# Altium PCB ETH_M_V1.PcbDoc
Units mm, origin at the board's own origin, x right, y up, seen from the top; angles counter-clockwise.
Board outline 30.8 x 19 mm, 2 copper layers (Top Layer, Bottom Layer); 28 components, 36 nets, 137 pads, 44 vias.
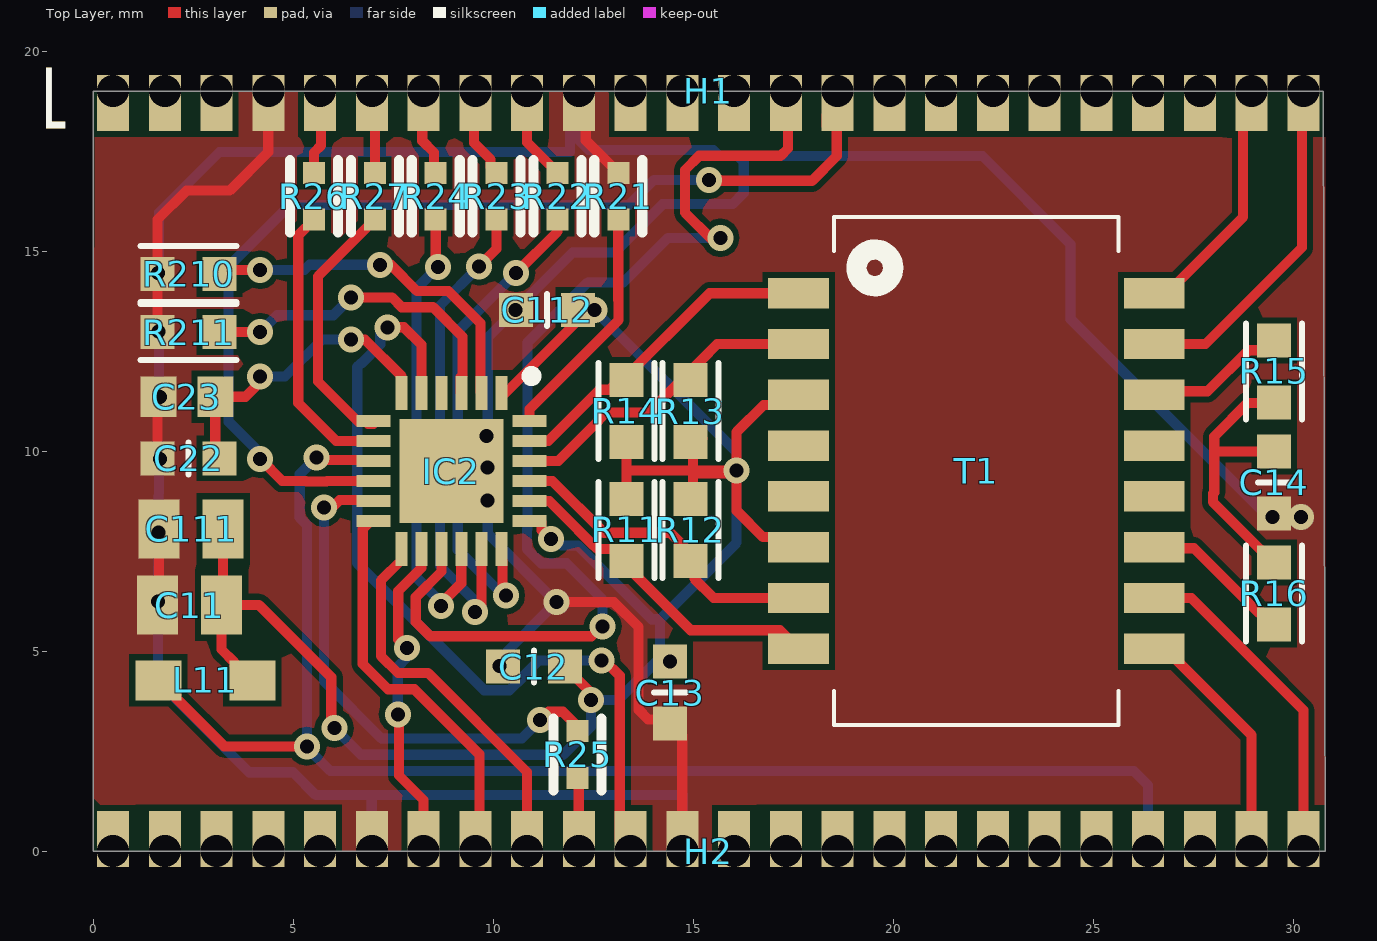
[diagram p0: Top Layer view]
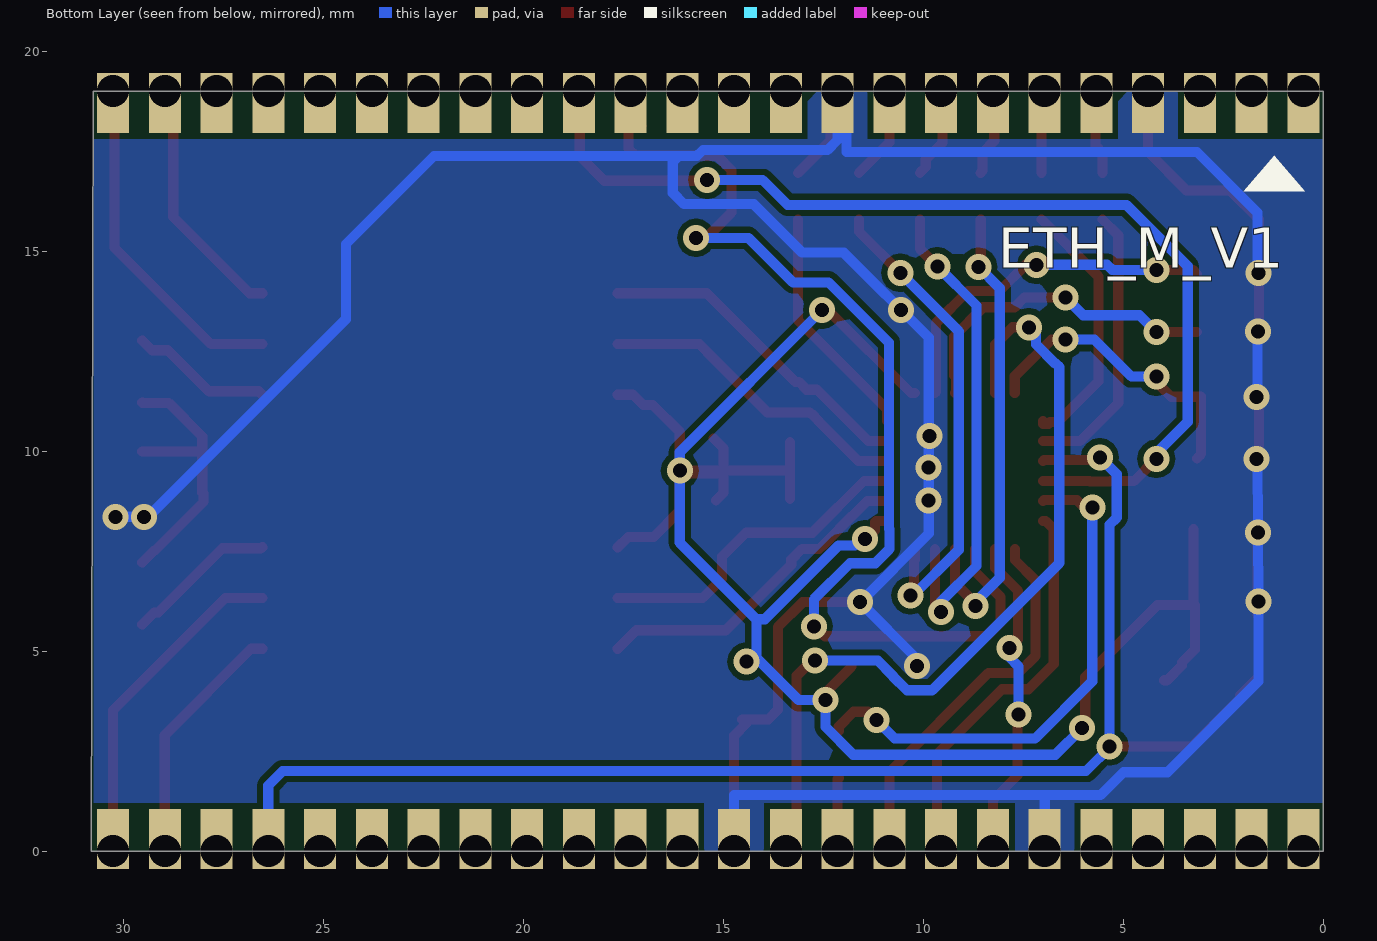
[diagram p1: Bottom Layer view, seen from below]
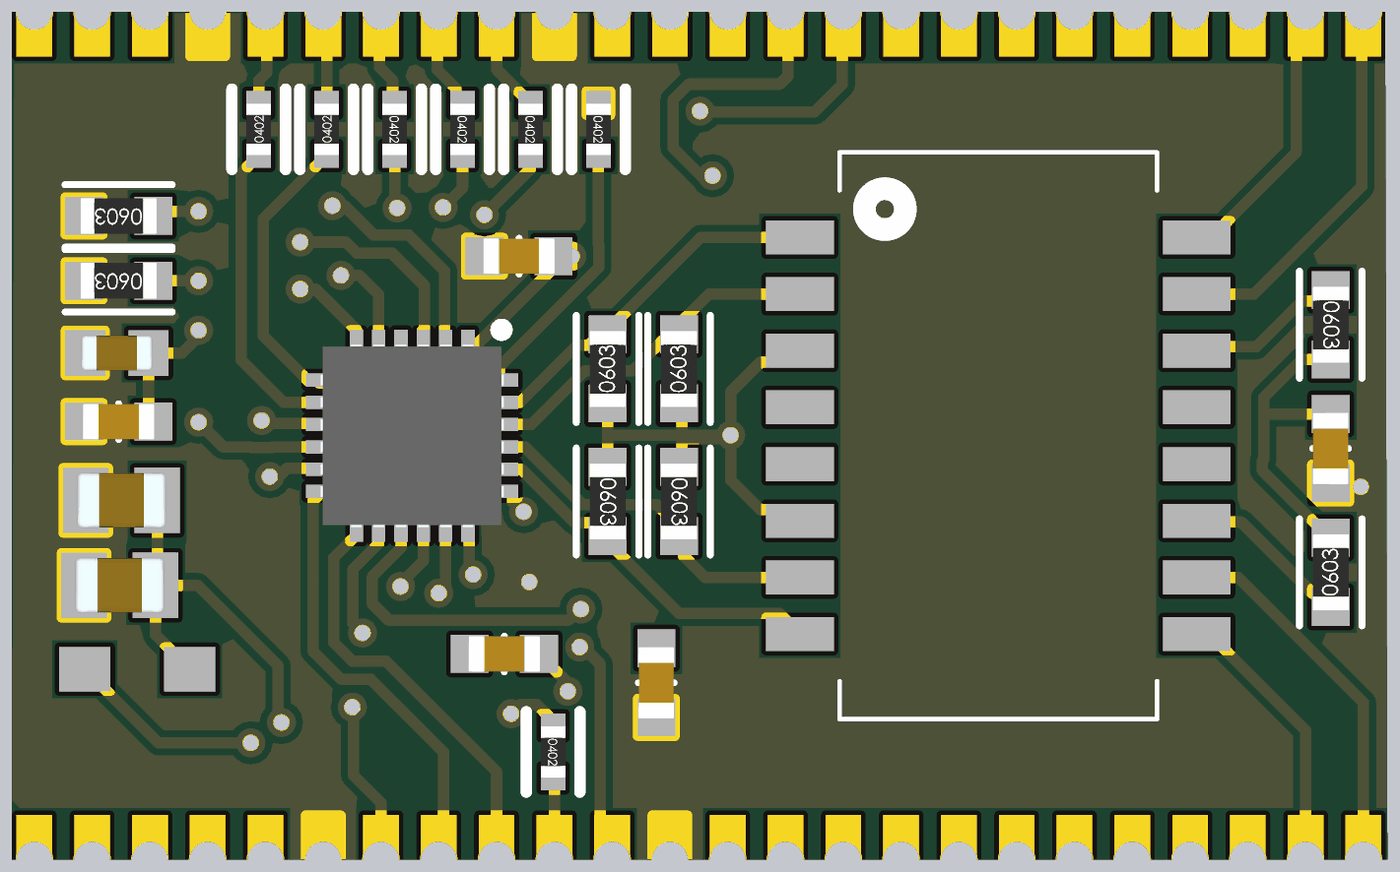
[diagram p2: 3D render of the assembled board from above, using the file's embedded part models]

## Layer stack, top to bottom
Top Solder: solder mask 0.0102, Solder Resist, Dk 3.5
Top Layer: signal copper 0.0356
Dielectric 1: dielectric 0.32, FR-4, Dk 4.8
Bottom Layer: signal copper 0.0356
Bottom Solder: solder mask 0.0102, Solder Resist, Dk 3.5

## Board outline
0,0 0,19 30.75,19 30.8,0

## Design rules (kind name [scope] priority, off if disabled: settings)
AssemblyTestPointUsage SilkToBoardRegionClearance_1 [All] p2:
AssemblyTestPointUsage SilkToBoardRegionClearance [All] p3:
Clearance [All] p1: gap=0.152 ignorepadtopadclearanceinfootprint=FALSE except(0: Arc-Hole Track-Hole SMDPad-Hole THPad-Hole Via-Hole Fill-Hole Poly-Hole Region-Hole Text-Hole)
HoleSize [All] p1: absolutevalues=TRUE maxlimit=6.35 minlimit=0.3 maxpercent=80.000 minpercent=20.000
MatchedLengths DiffPair_DIFF100MatchedLengths [InDifferentialPairClass('DIFF100')] p1: tolerance=0.152 checknetsindiffpair=TRUE checkdiffpairvsdiffpair=FALSE checkxsignals=FALSE checkothers=FALSE usedelayunits=FALSE
MinimumSolderMaskSliver [All] p1: minsoldermaskwidth=0.1
MinimumSolderMaskSliver SilkscreenOverComponentPads_2 [All] p2: minsoldermaskwidth=0.254
MinimumSolderMaskSliver SilkToSolderMaskClearance_1 [IsPad] p3: minsoldermaskwidth=0.254
MinimumSolderMaskSliver SilkscreenOverComponentPads_1 [All] p4: minsoldermaskwidth=0.254
MinimumSolderMaskSliver SilkToSolderMaskClearance [IsPad] p5: minsoldermaskwidth=0.254
MinimumSolderMaskSliver SilkscreenOverComponentPads [All] p6: minsoldermaskwidth=0.254
PolygonConnect [All] p1: connectstyle=Direct reliefconductorwidth=0.254 reliefentries=4 polygonreliefangle="90 Angle" airgapwidth=0.254
RoomDefinition ETH_M_V1 [InComponentClass('ETH_M_V1')] p1: confinementstyle=ConfineIn formatcopy=TRUE lockcomponents=FALSE outline -0.102,-0.559 30.81,-0.559 30.81,19.71 -0.102,19.71
RoutingVias [All] p1: holewidth=0.305 width=0.635 viastyle="Through Hole" minholewidth=0.305 minwidth=0.635 maxholewidth=0.711 maxwidth=1.27
SilkToBoardRegionClearance SilkToBoardRegionClearance_2 [All] p1:
SilkToSolderMaskClearance SilkToSolderMaskClearance_2 [IsPad] p1: minsilkscreentomaskgap=0.254 clearancetoexposedcopper=TRUE
SolderMaskExpansion [All] p1: expansion=0.102
Width [All] p1: maxlimit=2.54 minlimit=0.152 preferedwidth=0.254
26 further rules are at their usual default settings.

## Components (designator, comment, footprint, x,y, rotation, side; value= is the part's Value field where it differs from the comment)
C11 "C0805C475K3RACAUTO" CAPC2012X125N 2.413,6.147 r0 top
C12 "0.10µF" SMD-0603C 11.024,4.61 r270 top
C13 "0.10µF" SMD-0603C 14.427,3.962 r0 top
C14 "0.10µF" SMD-0603C 29.527,9.214 r0 top
C22 "470pF" SMD-0603C 2.388,9.817 r270 top
C23 "GCJ188R71E105KA01D" CAPC1608X100N 2.348,11.356 r0 top
C111 "C0805C475K3RACAUTO" CAPC2012X125N 2.451,8.052 r0 top
C112 "0.10µF" SMD-0603C 11.354,13.525 r270 top
H1 "CASTELLATED 24 pin" "CASTELLATED 24 pin" 30.26,19 r180 top locked
H2 "CASTELLATED 24 pin" "CASTELLATED 24 pin" 0.5,0 r0 top locked
IC2 "LAN8720A-CP-TR" QFN50P400X400X100-25N-D 8.961,9.5 r270 top
L11 "BLM21PG331SN1D" INDC2012X87 2.807,4.267 r180 top
R11 "49.9" SMD-0603-RES 13.335,8.026 r180 top
R12 "49.9" SMD-0603-RES 14.935,8.026 r180 top
R13 "49.9" SMD-0603-RES 14.935,10.998 r0 top
R14 "49.9" SMD-0603-RES 13.335,10.998 r0 top
R15 "75" SMD-0603-RES 29.527,11.989 r180 top
R16 "75" SMD-0603-RES 29.527,6.439 r0 top
R21 "12.1" SMD-0402-RES 13.132,16.37 r180 top
R22 "33" SMD-0402-RES 11.61,16.37 r180 top
R23 "33" SMD-0402-RES 10.089,16.37 r180 top
R24 "33" SMD-0402-RES 8.567,16.37 r180 top
R25 "33" SMD-0402-RES 12.116,2.413 r180 top
R26 "33" SMD-0402-RES 5.524,16.37 r0 top
R27 "33" SMD-0402-RES 7.046,16.37 r0 top
R210 "10k" SMD-0603-RES 2.388,14.427 r90 top
R211 "10k" SMD-0603-RES 2.388,12.974 r90 top
T1 "H0013NL" H0013NL 22.085,9.5 r270 top

## Footprints (in the part's own frame and the unit in brackets; to place one, negate y for a bottom-side part, rotate by r counter-clockwise, add the part's x,y. Pads: shape width x height; smd on the part's side, far side on the other; paste and mask are expansions set on the pad)
CAPC1608X100N [mm]
  rect 0.9x1.02 smd: 1(-0.71,0) 2(0.71,0)
  body extent -0.8,-0.4 0.8,0.4, height 1
CAPC2012X125N [mm]
  rect 1.02x1.47 smd: 1(-0.8,0) 2(0.8,0)
  body extent -1,-0.63 1,0.63, height 1.25
"CASTELLATED 24 pin" [mm]
  rect 0.8x1.4 / inner rect 0.8x1.5 / far side rect 0.8x1.5 hole 0.8 copper offset 0,0.3: 1(0,0) 2(1.294,0) 3(2.587,0) 4(3.881,0) 5(5.175,0) 6(6.469,0) 7(7.762,0) 8(9.056,0) 9(10.35,0) 10(11.644,0) 11(12.938,0) 12(14.232,0) 13(15.526,0) 14(16.82,0) 15(18.114,0) 16(19.408,0) 17(20.702,0) 18(21.996,0) 19(23.29,0) 20(24.584,0) 21(25.878,0) 22(27.172,0) 23(28.466,0) 24(29.76,0)
H0013NL [mm]
  rect 0.76x1.52 smd: 1(-4.445,-4.445) 2(-3.175,-4.445) 3(-1.905,-4.445) 4(-0.635,-4.445) 5(0.635,-4.445) 6(1.905,-4.445) 7(3.175,-4.445) 8(4.445,-4.445) 9(4.445,4.445) 10(3.175,4.445) 11(1.905,4.445) 12(0.635,4.445) 13(-0.635,4.445) 14(-1.905,4.445) 15(-3.175,4.445) 16(-4.445,4.445)
  silkscreen extent -6.35,-3.55 6.35,3.55
INDC2012X87 [mm]
  rect 1.15x1 smd: 1(-1.175,0) 2(1.175,0)
QFN50P400X400X100-25N-D [mm]
  rect 0.85x0.3 smd: 1(-1.95,1.25) 2(-1.95,0.75) 3(-1.95,0.25) 4(-1.95,-0.25) 5(-1.95,-0.75) 6(-1.95,-1.25) 13(1.95,-1.25) 14(1.95,-0.75) 15(1.95,-0.25) 16(1.95,0.25) 17(1.95,0.75) 18(1.95,1.25)
  rect 0.3x0.85 smd: 7(-1.25,-1.95) 8(-0.75,-1.95) 9(-0.25,-1.95) 10(0.25,-1.95) 11(0.75,-1.95) 12(1.25,-1.95) 19(1.25,1.95) 20(0.75,1.95) 21(0.25,1.95) 22(-0.25,1.95) 23(-0.75,1.95) 24(-1.25,1.95)
  rect 2.6x2.6 smd: 25(0,0)
  silkscreen extent -2.5,1.88 -2.25,2.13, body extent -2.05,-2.05 2.05,2.05, height 1
SMD-0402-RES [mm]
  rect 0.55x0.55 smd: 1(0,0.584) 2(0,-0.584)
  silkscreen extent -0.6,-0.9 0.6,0.9, body extent -0.28,-0.57 0.27,0.58, height 0.41
SMD-0603-RES [mm]
  rect 0.85x0.85 smd: 1(0,0.775) 2(0,-0.775)
  silkscreen extent -0.7,-1.2 0.7,1.2, body extent -0.4,-0.85 0.4,0.85, height 0.56
SMD-0603C [mm]
  rect 0.85x0.85 smd: 1(0,0.775) 2(0,-0.775)
  silkscreen extent -0.4,0 0.4,0, body extent -0.4,-0.8 0.4,0.8, height 0.9

## Part data
C11 C111: "Capacitor", Manufacturer_Name=Kemet, Mouser2 Part Number=80-C0805C475K3RAUTO, Datasheet Link=https://componentsearchengine.com/Datasheets/1/C0805C475K3RACAUTO.pdf, Height=1.25mm, Manufacturer_Part_Number=C0805C475K3RACAUTO, Mouser2 Price/Stock=https://www.mouser.com/Search/Refine.aspx?Keyword=80-C0805C475K3RAUTO, Supplier 1=Mouser, Supplier Part Number 1=80-C0805C475K3RAUTO
C12 C13 C14 C112: library part GCJ188R71H104KA12D, "CAP CER 0.1UF 50V X7R 0603", Digi-Key Part Number=490-5798-1-ND, Manufacturer="Murata Electronics North America", Operating Temperature="-55°C ~ 125°C", Package / Case="0603 (1608 Metric)", Ratings=AEC-Q200, Supplier Part Number 1=81-GCJ188R71H104KA2D, Temperature Coefficient=X7R, Tolerance=±10%, Voltage=50V, @ qty=0, Applications="Automotive, Boardflex Sensitive", Datasheets=http://www.murata.com/~/media/webrenewal/support/library/catalog/products/capacitor/mlcc/c03e.ashx, Factory Stock=0, Features="Soft Termination", Height - Seated (Max)=-, Image=//media.digikey.com/Renders/Murata%20Renders/0603%28LQG18%29.jpg, Lead Spacing=-, Lead Style=-, Minimum Quantity=1, Mounting Type="Surface Mount, MLCC", Packaging="Cut Tape (CT)", Part Number=GCJ188R71H104KA12D, Part Status=Active, Quantity Available=163695, Series=GCJ, Size / Dimension="0.063\" L x 0.031\" W (1.60mm x 0.80mm)", Supplier 1=Mouser, Thickness (Max)="0.035\" (0.90mm)", Unit Price (USD)=0.12
C22: library part GRM1885C1H471JA01D, "CAP CER 470PF 50V NP0 0603", Digi-Key Part Number=490-1443-1-ND, Manufacturer="Murata Electronics North America", Operating Temperature="-55°C ~ 125°C", Package / Case="0603 (1608 Metric)", Ratings=-, Supplier Part Number 1=81-GRM39C471J50, Temperature Coefficient="C0G, NP0", Tolerance=±5%, Voltage=50V, @ qty=0, Applications="General Purpose", Datasheets=http://www.murata.com/~/media/webrenewal/support/library/catalog/products/capacitor/mlcc/c02e.pdf, Factory Stock=0, Features=-, Height - Seated (Max)=-, Image=//media.digikey.com/Renders/Murata%20Renders/ZRB-SERIES-0402.jpg, Lead Spacing=-, Lead Style=-, Minimum Quantity=1, Mounting Type="Surface Mount, MLCC", Packaging="Cut Tape (CT)", Part Number=GRM1885C1H471JA01D, Part Status=Active, Quantity Available=472909, Series=GRM, Size / Dimension="0.063\" L x 0.031\" W (1.60mm x 0.80mm)", Supplier 1=Mouser, Thickness (Max)="0.035\" (0.90mm)", Unit Price (USD)=0.11
C23: "Capacitor", Manufacturer_Name="Murata Electronics", Supplier Part Number 1=81-GCJ188R71E105KA1D, Datasheet Link=https://psearch.en.murata.com/capacitor/product/GCJ188R71E105KA01%23.html, Height=1mm, Manufacturer_Part_Number=GCJ188R71E105KA01D, Supplier 1=Mouser
IC2: "Integrated Circuit", Manufacturer_Name=Microchip, Mouser2 Part Number=886-LAN8720A-CP-TR, Datasheet Link=https://componentsearchengine.com/Datasheets/1/LAN8720A-CP-TR.pdf, Height=1mm, Manufacturer_Part_Number=LAN8720A-CP-TR, Mouser2 Price/Stock=https://www.mouser.com/Search/Refine.aspx?Keyword=886-LAN8720A-CP-TR, Supplier 1=Mouser, Supplier Part Number 1=886-LAN8720A-CP-TR
L11: "Ferrite Beads Multi-Layer 330Ohm 25% 100MHz 1.5A 70mOhm DCR 0805 Paper T/R", Package="0805 Murata", Supplier Part Number 1=81-BLM21P331SG, Digi-Key_Part_Number=490-5988-1-ND, Digi-Key_Purchase_URL=https://www.digikey.ru/product-detail/en/murata-electronics-north-america/BLM21PG331SN1D/490-5988-1-ND/3845188?utm_source=snapeda&utm_medium=aggregator&utm_campaign=symbol, MF=Murata, MP=BLM21PG331SN1D, SnapEDA_Link=https://www.snapeda.com/parts/BLM21PG331SN1D/Murata%20Electronics%20North%20America/view-part/?ref=snap, Supplier 1=Mouser
R11 R12 R13 R14: library part ERJ-3EKF49R9V, "RES SMD 49.9 OHM 1% 1/10W 0603", Digi-Key Part Number=P49.9HCT-ND, Manufacturer="Panasonic Electronic Components", Operating Temperature="-55°C ~ 155°C", Package / Case="0603 (1608 Metric)", Power (Watts)="0.1W, 1/10W", Supplier Device Package=0603, Supplier Part Number 1=667-ERJ-3EKF49R9V, Temperature Coefficient=±100ppm/°C, Tolerance=±1%, @ qty=1500, Composition="Thick Film", Datasheets=http://industrial.panasonic.com/www-cgi/jvcr13pz.cgi?E+PZ+3+AOA0002+ERJ3EKF49R9V+7+WW, Factory Stock=0, Failure Rate=-, Features="Automotive AEC-Q200", Height - Seated (Max)="0.022\" (0.55mm)", Image=//media.digikey.com/Photos/Panasonic%20Photos/MFG_ERJ-P6W%20Series.jpg, Minimum Quantity=1, Number of Terminations=2, Packaging="Cut Tape (CT)", Part Number=ERJ-3EKF49R9V, Part Status=Active, Quantity Available=566023, Series=ERJ, Size / Dimension="0.063\" L x 0.031\" W (1.60mm x 0.80mm)", Supplier 1=Mouser, Unit Price (USD)=0.00379
R15 R16: library part ERJ-3EKF75R0V, "RES SMD 75 OHM 1% 1/10W 0603", Digi-Key Part Number=P75.0HCT-ND, Manufacturer="Panasonic Electronic Components", Operating Temperature="-55°C ~ 155°C", Package / Case="0603 (1608 Metric)", Power (Watts)="0.1W, 1/10W", Supplier Device Package=0603, Supplier Part Number 1=667-ERJ-3EKF75R0V, Temperature Coefficient=±100ppm/°C, Tolerance=±1%, @ qty=1500, Composition="Thick Film", Datasheets=http://industrial.panasonic.com/www-cgi/jvcr13pz.cgi?E+PZ+3+AOA0002+ERJ3EKF75R0V+7+WW, Factory Stock=0, Failure Rate=-, Features="Automotive AEC-Q200", Height - Seated (Max)="0.022\" (0.55mm)", Image=//media.digikey.com/Photos/Panasonic%20Photos/MFG_ERJ-P6W%20Series.jpg, Minimum Quantity=1, Number of Terminations=2, Packaging="Cut Tape (CT)", Part Number=ERJ-3EKF75R0V, Part Status=Active, Quantity Available=236923, Series=ERJ, Size / Dimension="0.063\" L x 0.031\" W (1.60mm x 0.80mm)", Supplier 1=Mouser, Unit Price (USD)=0.00379
R21: library part ERJ-2RKF12R1X, "RES SMD 12.1 OHM 1% 1/10W 0402", Digi-Key Part Number=P12.1LCT-ND, Manufacturer="Panasonic Electronic Components", Operating Temperature="-55°C ~ 155°C", Package / Case="0402 (1005 Metric)", Power (Watts)="0.1W, 1/10W", Supplier Device Package=0402, Supplier Part Number 1=667-ERJ-2RKF12R1X, Temperature Coefficient=±100ppm/°C, Tolerance=±1%, @ qty=1500, Composition="Thick Film", Datasheets=http://industrial.panasonic.com/www-cgi/jvcr13pz.cgi?E+PZ+3+AOA0002+ERJ2RKF12R1X+7+WW, Factory Stock=0, Failure Rate=-, Features="Automotive AEC-Q200", Height - Seated (Max)="0.016\" (0.40mm)", Image=//media.digikey.com/Photos/Panasonic%20Photos/ERJ-PA2-Series.jpg, Minimum Quantity=1, Number of Terminations=2, Packaging="Cut Tape (CT)", Part Number=ERJ-2RKF12R1X, Part Status=Active, Quantity Available=33252, Series=ERJ, Size / Dimension="0.039\" L x 0.020\" W (1.00mm x 0.50mm)", Supplier 1=Mouser, Unit Price (USD)=0.00408
R22 R23 R24 R25 R26 R27: library part ERJ-2GEJ330X, "RES SMD 33 OHM 5% 1/10W 0402", Digi-Key Part Number=P33JCT-ND, Manufacturer="Panasonic Electronic Components", Operating Temperature="-55°C ~ 155°C", Package / Case="0402 (1005 Metric)", Power (Watts)="0.1W, 1/10W", Supplier Device Package=0402, Supplier Part Number 1=667-ERJ-2GEJ330X, Temperature Coefficient=±200ppm/°C, Tolerance=±5%, @ qty=1500, Composition="Thick Film", Datasheets=http://industrial.panasonic.com/www-cgi/jvcr13pz.cgi?E+PZ+3+AOA0001+ERJ2GEJ330X+7+WW, Factory Stock=0, Failure Rate=-, Features="Automotive AEC-Q200", Height - Seated (Max)="0.016\" (0.40mm)", Image=//media.digikey.com/Photos/Panasonic%20Photos/ERJ-PA2-Series.jpg, Minimum Quantity=1, Number of Terminations=2, Packaging="Cut Tape (CT)", Part Number=ERJ-2GEJ330X, Part Status=Active, Quantity Available=857104, Series=ERJ, Size / Dimension="0.039\" L x 0.020\" W (1.00mm x 0.50mm)", Supplier 1=Mouser, Unit Price (USD)=0.00350
R210 R211: library part ERJ-3EKF1002V, "RES SMD 10K OHM 1% 1/10W 0603", Digi-Key Part Number=P10.0KHCT-ND, Manufacturer="Panasonic Electronic Components", Operating Temperature="-55°C ~ 155°C", Package / Case="0603 (1608 Metric)", Power (Watts)="0.1W, 1/10W", Supplier Device Package=0603, Supplier Part Number 1=667-ERJ-3EKF1002V, Temperature Coefficient=±100ppm/°C, Tolerance=±1%, @ qty=1500, Composition="Thick Film", Datasheets=http://industrial.panasonic.com/www-cgi/jvcr13pz.cgi?E+PZ+3+AOA0002+ERJ3EKF1002V+7+WW, Factory Stock=0, Failure Rate=-, Features="Automotive AEC-Q200", Height - Seated (Max)="0.022\" (0.55mm)", Image=//media.digikey.com/Photos/Panasonic%20Photos/MFG_ERJ-P6W%20Series.jpg, Minimum Quantity=1, Number of Terminations=2, Packaging="Cut Tape (CT)", Part Number=ERJ-3EKF1002V, Part Status=Active, Quantity Available=6703141, Series=ERJ, Size / Dimension="0.063\" L x 0.031\" W (1.60mm x 0.80mm)", Supplier 1=Mouser, Unit Price (USD)=0.00379
T1: "Transformer", Manufacturer_Name=Pulse, Supplier Part Number 1=673-H0013NL, Datasheet Link=https://productfinder.pulseeng.com/products/datasheets/H304.pdf, Height=1mm, Manufacturer_Part_Number=H0013NL, Supplier 1=Mouser

## Via types
v1: diameter 0.65/0.65 (per signal layer), hole 0.35, Top Layer to Bottom Layer, tented both sides, 44 vias

## Nets (pads, with @x,y where several pads share a name; then routed paths per layer and width w, separated by ;. In a path a pad name is that pad's centre, name@x,y a point inside that pad or via, vN(x,y) a via of type N, cw(c..) or ccw(c..) an arc to the next point about the centre after c; other vN are vias at no path point)
D2-1: H1.10 IC2.10 | length 27
  Top Layer w0.254: v1(4.178,9.804) 4.733,9.25 5.326,9.25 5.338,9.238 5.838,9.238 5.85,9.25 IC2.10 ; v1(15.405,16.777) 15.685,16.777 15.703,16.759 17.978,16.759 18.593,17.374 18.593,18.15 H1.10@18.48,18.264 ; H1.10 18.616,18.4 H1.10@18.48,18.264 ; H1.10@18.48,18.264 18.343,18.127 18.343,18.4 H1.10@18.48,18.264
  Bottom Layer w0.254: v1(4.178,9.804) 4.178,9.944 3.391,10.731 3.391,14.618 4.928,16.154 13.399,16.154 14.021,16.777 v1(15.405,16.777)
D2-2: H1.11 IC2.15 | length 28.2
  Top Layer w0.254: IC2.15 8.711,6.987 8.07,6.346 8.07,5.731 8.433,5.368 12.463,5.368 12.709,5.613 12.738,5.584 v1(12.738,5.613) ; v1(15.684,15.329) 15.43,15.329 14.801,15.959 14.801,17.027 15.155,17.381 17.191,17.381 17.374,17.564 17.374,18.127 17.049,18.127 17.322,18.4 H1.11
  Bottom Layer w0.254: v1@12.827,5.524 v1(12.738,5.613) 12.738,6.29 11.835,7.193 11.205,7.193 10.851,7.547 10.851,8.048 10.86,8.057 10.86,12.705 12.371,14.216 13.264,14.216 14.376,15.329 v1(15.684,15.329)
ETH1_1: H2.7 IC2.14 | length 8.2
  Top Layer w0.254: v1(7.62,3.416) 7.648,3.388 7.648,1.89 8.262,1.275 H2.7 ; v1(7.849,5.08) 7.633,5.296 7.633,6.502 8.211,7.08 IC2.14
  Bottom Layer w0.254: v1(7.62,3.416) 7.62,4.61 7.849,4.839 v1(7.849,5.08)
ETH1_2: H2.8 IC2.12 | length 10
  Top Layer w0.254: IC2.12 6.944,8.25 6.744,8.049 6.744,4.674 7.374,4.044 8.034,4.044 9.66,2.418 9.66,0.103 H2.8
ETH1_3: H2.9 IC2.13 | length 9.7
  Top Layer w0.254: IC2.13 7.711,7.275 7.201,6.765 7.201,4.873 7.624,4.45 8.377,4.45 10.85,1.977 H2.9
ETH1_4: H2.10 R25.1 | length 1.8
  Top Layer w0.254: R25.1 12.144,1.801 H2.10
ETH1_5: H2.11 IC2.5 | length 21.3
  Top Layer w0.254: v1(7.366,13.094) 7.772,13.094 8.211,12.655 IC2.5 ; v1(12.713,4.763) 12.789,4.763 13.17,4.381 13.17,0.268 H2.11
  Bottom Layer w0.254: v1(7.366,13.094) 7.182,12.91 7.182,12.662 6.705,12.184 6.685,12.184 6.604,12.103 6.604,7.197 9.783,4.018 10.41,4.018 10.764,4.372 10.764,4.385 11.142,4.763 v1(12.713,4.763)
ETH1_6: H1.20 R26.1 | length 2.1
  Top Layer w0.254: R26.1 5.524,17.462 5.702,17.64 5.702,18.974 H1.20
ETH1_7: H1.19 R27.1 | length 2.1
  Top Layer w0.254: H1.19 7.046,18.924 R27.1
ETH1_8: H1.18 R24.2 | length 2.2
  Top Layer w0.254: H1.18 8.23,18.966 8.23,17.755 8.522,17.462 8.522,16.999 R24.2
ETH1_9: H1.17 R23.2 | length 2.3
  Top Layer w0.254: H1.17 9.525,18.967 9.525,17.704 9.941,17.288 9.941,17.103 R23.2
ETH1_10: H1.16 R22.2 | length 2.4
  Top Layer w0.254: H1.16 10.852,17.713 R22.2
ETH_VCC: C11.2 C12.1 C13.1 C111.2 C112.1 IC2.1 IC2.19 L11.1 R11.2 R12.2 R13.2 R14.2 T1.3 T1.6 | length 51.3
  Top Layer w0.254: C111.2 3.251,6.185 C11.2 ; L11.1 3.907,4.267 3.534,4.64 3.534,4.715 3.213,5.036 C11.2 ; v1(6.032,3.073) 5.956,3.15 5.956,4.343 4.153,6.147 C11.2 ; IC2.1 10.312,11.45 12.388,13.525 v1(12.535,13.525) ; IC2.19 11.186,8.25 11.209,8.227 11.209,8.009 ; C12.1 v1@12.637,3.772 ; R11.2 13.335,9.512 ; R14.2 13.335,9.512 ; R12.2@15.189,8.763 14.999,8.954 14.999,9.437 16.015,9.437 v1(16.091,9.512) ; R13.2@15.24,10.312 14.999,10.071 14.999,9.588 14.922,9.512 ; T1.6 17.387,7.848 16.75,7.848 16.091,8.507 v1(16.091,9.512) ; T1.3 17.26,11.405 17.007,11.152 16.765,11.152 16.091,10.478 v1(16.091,9.512) ; 13.335,9.512 14.922,9.512 ; 14.922,9.512 v1(16.091,9.512)
  Bottom Layer w0.254: v1(6.032,3.073) 6.7,2.405 11.753,2.405 12.446,3.099 v1(12.446,3.772) 13.119,3.772 v1@14.177,4.83 ; v1(11.455,7.798) 11.557,7.798 11.713,7.641 12.12,7.641 13.966,5.795 14.177,5.795 ; v1(12.535,13.525) 16.091,9.97 v1(16.091,9.512) 16.091,7.709 14.177,5.795 ; v1(14.427,4.737) 14.351,4.813 14.193,4.813 v1@14.177,4.83 ; v1@14.177,4.83 14.177,5.795
ETHM_RN: IC2.22 R13.1 T1.2 | length 8
  Top Layer w0.254: IC2.22 11.63,9.75 12.631,10.751 12.631,10.764 12.794,10.928 12.807,10.928 12.84,10.96 13.894,10.96 15.405,12.472 15.405,12.475 15.605,12.675 T1.2
ETHM_RP: IC2.23 R14.1 T1.1 | length 8.3
  Top Layer w0.254: IC2.23 11.381,10.25 12.663,11.532 12.916,11.532 13.112,11.728 13.201,11.728 15.418,13.945 T1.1
ETHM_TN: IC2.20 R11.1 T1.8 | length 8.3
  Top Layer w0.254: IC2.20 11.405,8.75 12.114,8.041 ; 12.122,8.033 12.52,7.635 12.524,7.635 12.61,7.549 13.039,7.549 13.306,7.283 13.306,7.154 14.94,5.519 17.176,5.519 T1.8
ETHM_TP: IC2.21 R12.1 T1.7 | length 8.3
  Top Layer w0.254: IC2.21 11.484,9.25 12.778,7.956 14.434,7.956 15.034,7.356 15.034,6.81 15.519,6.325 T1.7
ETHP_RX+: H1.2 T1.16 | length 6.3
  Top Layer w0.254: T1.16 26.848,13.945 28.753,15.85 28.753,18.786 H1.2
ETHP_RX-: H1.1 T1.15 | length 8.6
  Top Layer w0.254: T1.15 27.813,12.675 30.226,15.088 30.226,18.966 H1.1
ETHP_TX+: H2.24 T1.10 | length 8.4
  Top Layer w0.254: T1.10 27.457,6.325 30.26,3.522 H2.24
ETHP_TX-: H2.23 T1.9 | length 6.2
  Top Layer w0.254: T1.9 26.809,5.055 28.966,2.898 H2.23
GND: C11.1 C12.2 C13.2 C14.2 C22.2 C23.1 C111.1 C112.2 H1.15 H1.21 H2.6 H2.12 IC2.25 R21.2 R210.1 R211.1 | length 103.4
  Top Layer w0.254: C22.2 C23.1@1.613,11.331 ; R211.1 R210.1 1.613,15.786 2.337,16.51 3.416,16.51 4.382,17.476 H1.21 ; C11.1@1.651,5.918 C111.1 ; v1(11.582,6.223) 13.019,6.223 13.64,5.602 13.64,3.531 13.881,3.289 C13.2@14.529,3.289 ; H1.15 12.319,18.828 12.319,17.768 R21.2 ; C13.2 14.732,2.883 H2.12
  Bottom Layer w0.254: 1.626,4.534 1.626,4.242 3.899,1.968 5,1.968 5.572,1.397 6.969,1.397 ; 1.626,4.559 v1(1.626,6.236) v1@1.651,9.804 ; v1@1.651,11.354 v1@1.651,12.992 ; v1@1.651,14.453 1.651,15.964 3.162,17.475 11.925,17.475 11.925,18.571 H1.15@12.146,18.35 ; H2.6 6.969,1.397 ; v1(10.16,4.623) 10.16,4.801 v1(11.582,6.223) 9.868,7.938 v1(9.868,8.763) v1(9.868,9.588) 9.868,12.84 11.989,14.961 13.03,14.961 14.242,16.172 15.985,16.172 16.269,16.456 16.269,17.225 16.12,17.374 ; H1.15 H1.15@12.146,18.35 ; H2.12 14.732,1.397 6.969,1.397 ; v1(30.201,8.357) v1(29.489,8.357) 29.382,8.357 24.455,13.284 24.435,13.284 24.435,15.176 22.238,17.374 16.12,17.374 ; H1.15@12.146,18.35 12.146,17.775 12.395,17.526 15.511,17.526 15.663,17.374 16.12,17.374
  other v1: 1.638,7.963 1.676,9.804 9.842,10.376 1.676,11.354 1.638,12.992 10.566,13.525 1.626,14.453
NetC14_1: C14.1 R15.1 R16.1 | length 7.2
  Top Layer w0.254: R16.1 29.229,7.512 29.209,7.512 27.997,8.724 27.997,8.934 28.029,8.966 28.029,9.982 ; C14.1 28.036,9.989 28.029,9.982 ; R15.1 29.518,11.205 28.87,11.205 28.029,10.363 28.029,9.982
NetC22_1: C22.1 C23.2 IC2.6 | length 7.6
  Top Layer w0.254: C22.1 3.058,9.922 C23.2 3.808,11.356 3.81,11.354 v1@4.318,11.862 ; v1@6.401,12.789 v1(6.454,12.789) 6.794,12.789 7.716,11.867 7.716,11.455 IC2.6
  Bottom Layer w0.254: v1@4.318,11.862 4.801,11.862 5.728,12.789 v1@6.401,12.789
  other v1: 4.178,11.862
NetIC2_2: IC2.2 R210.2 | length 9
  Top Layer w0.254: R210.2 3.264,14.529 v1(4.178,14.529) ; v1(7.175,14.656) 7.442,14.656 8.097,14.001 8.885,14.001 9.688,13.198 9.688,11.473 IC2.2
  Bottom Layer w0.254: v1(4.178,14.529) 5.283,14.529 5.41,14.656 v1(7.175,14.656)
NetIC2_3: IC2.3 R211.2 | length 8.3
  Top Layer w0.254: R211.2 v1(4.178,12.974) ; v1(6.454,13.84) 7.474,13.84 7.72,13.594 8.504,13.594 9.234,12.864 9.234,11.895 9.188,11.849 9.188,11.473 IC2.3
  Bottom Layer w0.254: v1(4.178,12.974) 4.598,13.393 6.007,13.393 v1(6.454,13.84)
NetIC2_7: IC2.7 R27.2 | length 6.5
  Top Layer w0.254: IC2.7 7.011,10.679 6.881,10.679 6.834,10.727 6.638,10.727 5.626,11.739 5.626,14.366 R27.2
NetIC2_8: IC2.8 R26.2 | length 7
  Top Layer w0.254: R26.2 5.131,15.392 5.131,11.201 6.082,10.25 IC2.8
NetIC2_11: IC2.11 R25.2 | length 13.3
  Top Layer w0.254: v1(5.772,8.585) 5.973,8.585 6.161,8.773 6.988,8.773 IC2.11 ; v1@11.176,3.454 v1(11.176,3.27) 11.386,3.48 11.747,3.48 12.116,3.111 R25.2
  Bottom Layer w0.254: v1@5.779,8.585 5.779,4.242 7.208,2.812 10.718,2.812 v1(11.176,3.27)
NetIC2_16: IC2.16 R24.1 | length 11.9
  Top Layer w0.254: R24.1 8.567,14.661 v1(8.623,14.605) ; v1@8.668,6.153 9.207,6.693 9.207,7.547 IC2.16 ; v1@8.674,6.018 8.7,6.043 v1(8.7,6.121)
  Bottom Layer w0.254: v1(8.623,14.605) 8.09,14.072 8.09,6.834 8.7,6.223 8.674,6.197 8.7,6.171 v1(8.7,6.121)
NetIC2_17: IC2.17 R23.1 | length 12.5
  Top Layer w0.254: v1(9.555,5.972) 9.711,6.128 IC2.17 ; v1(9.652,14.618) 10.089,15.055 R23.1
  Bottom Layer w0.254: v1@9.555,5.926 v1(9.555,5.972) 9.555,6.243 8.674,7.125 8.674,13.64 v1(9.652,14.618)
NetIC2_18: IC2.18 R22.1 | length 12.2
  Top Layer w0.254: IC2.18 10.211,7.275 10.234,7.252 10.234,6.479 v1(10.325,6.388) ; v1(10.579,14.453) 11.61,15.484 R22.1
  Bottom Layer w0.254: v1(10.325,6.388) 10.289,6.388 10.274,6.374 9.119,7.53 9.119,12.992 v1(10.579,14.453)
NetIC2_24: IC2.24 R21.1 | length 6
  Top Layer w0.254: IC2.24 10.911,11.047 13.139,13.275 13.139,13.776 13.132,13.783 R21.1
NetR15_2: R15.2 T1.14 | length 3.6
  Top Layer w0.254: T1.14 26.619,11.493 27.864,11.493 28.89,12.52 29.284,12.52 R15.2
NetR16_2: R16.2 T1.11 | length 3.8
  Top Layer w0.254: T1.11 26.558,7.568 27.523,7.568 29.128,5.962 29.229,5.962 R16.2
VCC2: H2.21 IC2.9 L11.2 | length 36.5
  Top Layer w0.254: L11.2 1.707,4.267 2.08,3.894 2.08,3.819 3.283,2.616 v1(5.347,2.616) ; v1(5.588,9.842) 5.658,9.773 6.988,9.773 IC2.9
  Bottom Layer w0.254: v1@5.332,2.602 5.935,1.999 23.725,1.999 26.017,1.999 26.378,1.638 H2.21 ; v1@5.388,2.616 v1(5.347,2.616) 5.347,8.156 5.167,8.335 5.167,9.422 v1(5.588,9.842)
pads on no net: H1.3 H1.4 H1.5 H1.6 H1.7 H1.8 H1.9 H1.12 H1.13 H1.14 H1.22 H1.23 H1.24 H2.1 H2.2 H2.3 H2.4 H2.5 H2.13 H2.14 H2.15 H2.16 H2.17 H2.18 H2.19 H2.20 H2.22 IC2.4 T1.4 T1.5 T1.12 T1.13

## Polygon pours and split planes (outlines as drawn)
GND on Bottom Layer "GND_L02_P010" (solid, pour order 10): 0,18.986 0,0.013 30.81,0.013 30.823,0.025 30.747,0.102 30.747,18.999
no net on Bottom Layer "NONET_L02_P000" (solid, pour order 0): 0.254,18.161
GND on Top Layer "GND_L01_P012" (solid, pour order 12): 0.051,18.974 30.747,18.974 30.759,18.986 30.81,18.936 30.81,0.013 0.013,0.013 0,0.025
no net on Top Layer "NONET_L01_P006" (solid, pour order 6): -0.102,-0.559

## Silkscreen, mask and mechanical layers (free items; w line width, h text height)
Bottom Overlay:
  region: 1.232,17.386 0.47,16.497 1.994,16.497
  text "ETH_M_V1" at 8.128,14.58 h1
Mechanical 1:
  pour cut-out: 5.961,11.462
  lines w0.2: 30.75,0 0,0 0,19 30.75,19 30.8,0